# EAGLE board E-P-206-R2.0.0 Fuel Cell Control (Board to Board) (EAGLE 7.7.0), part 1 of 2
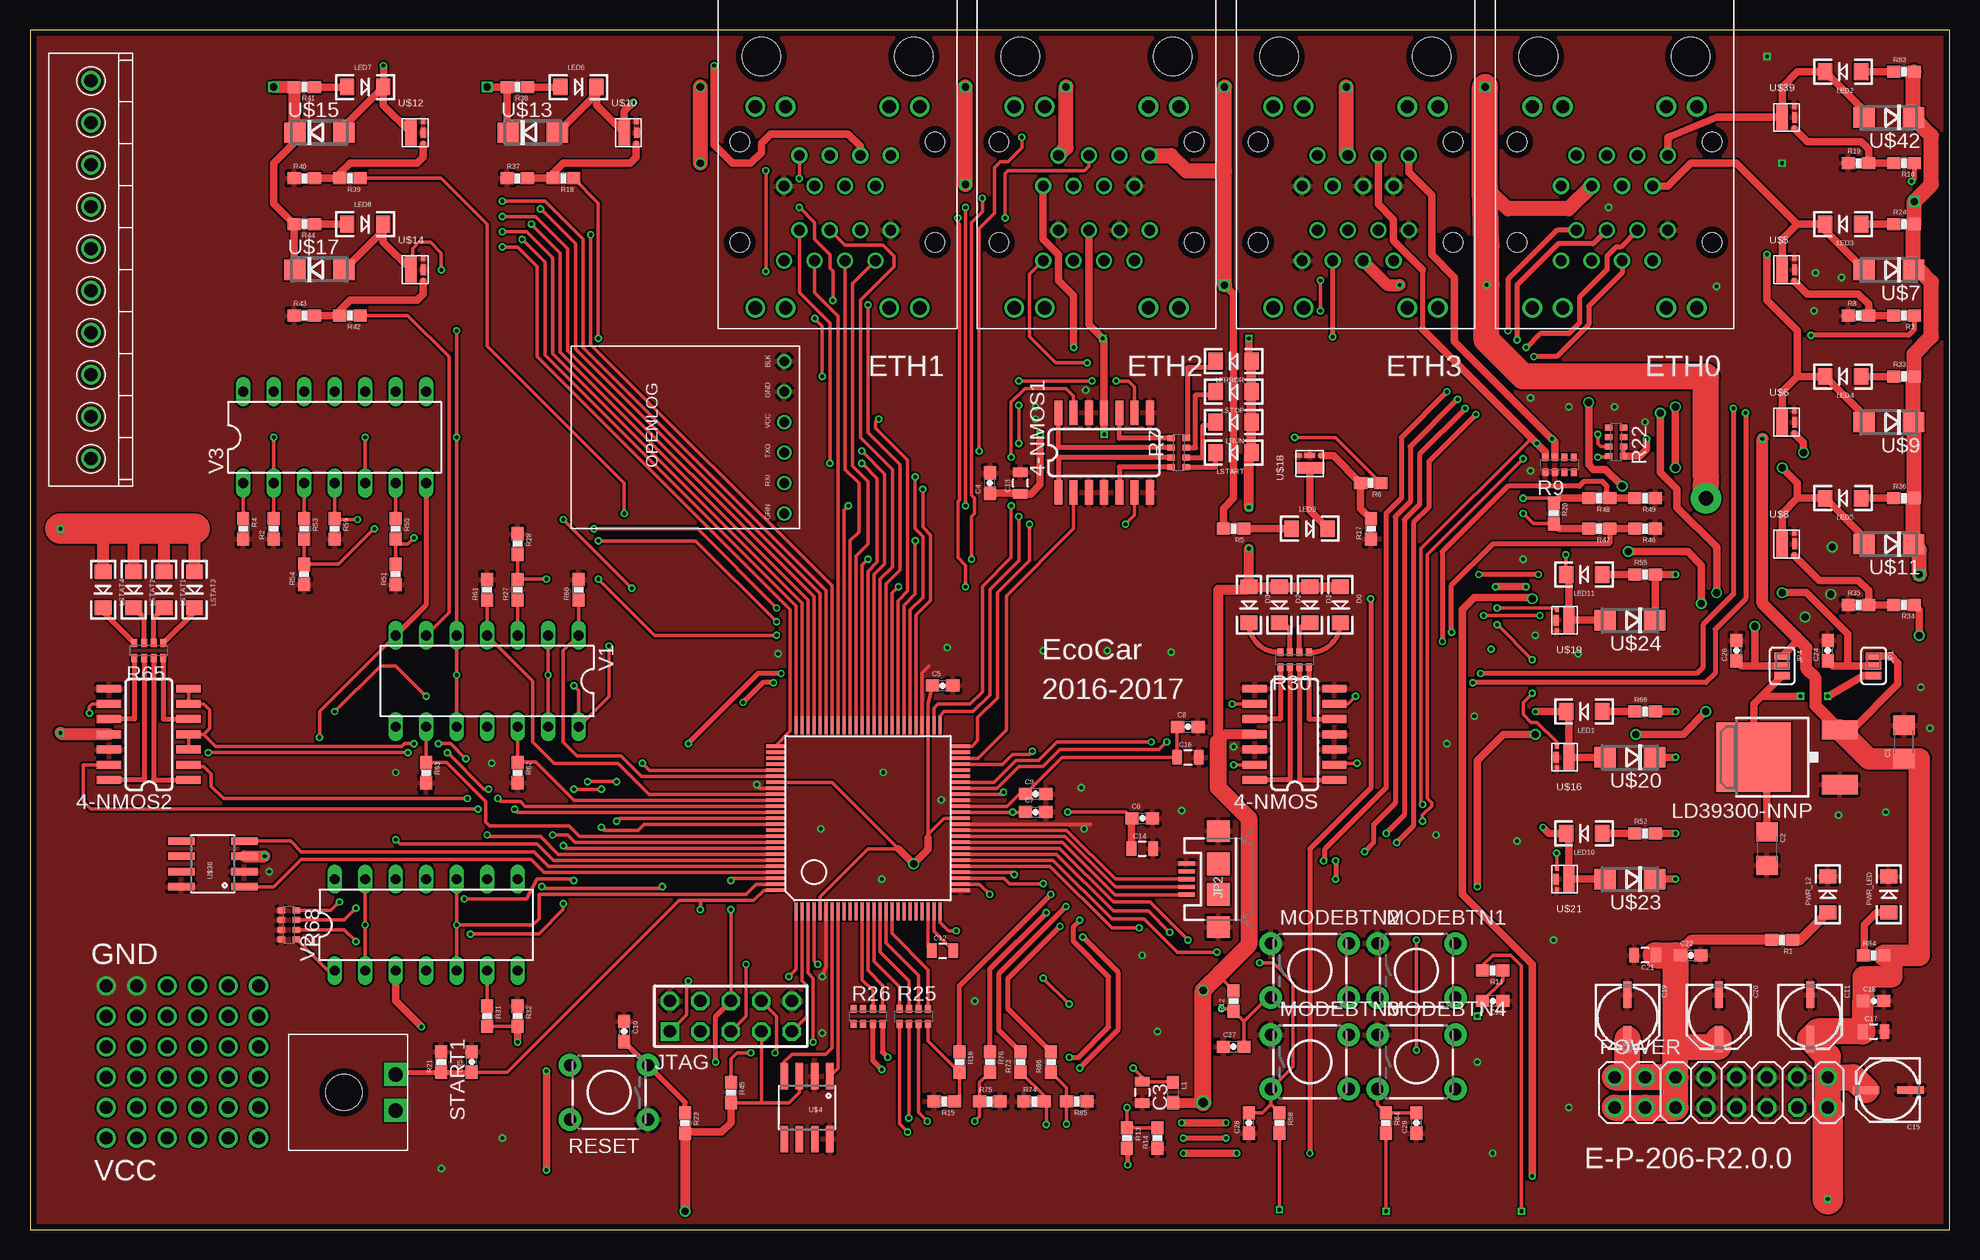
[diagram p0: board, top side]
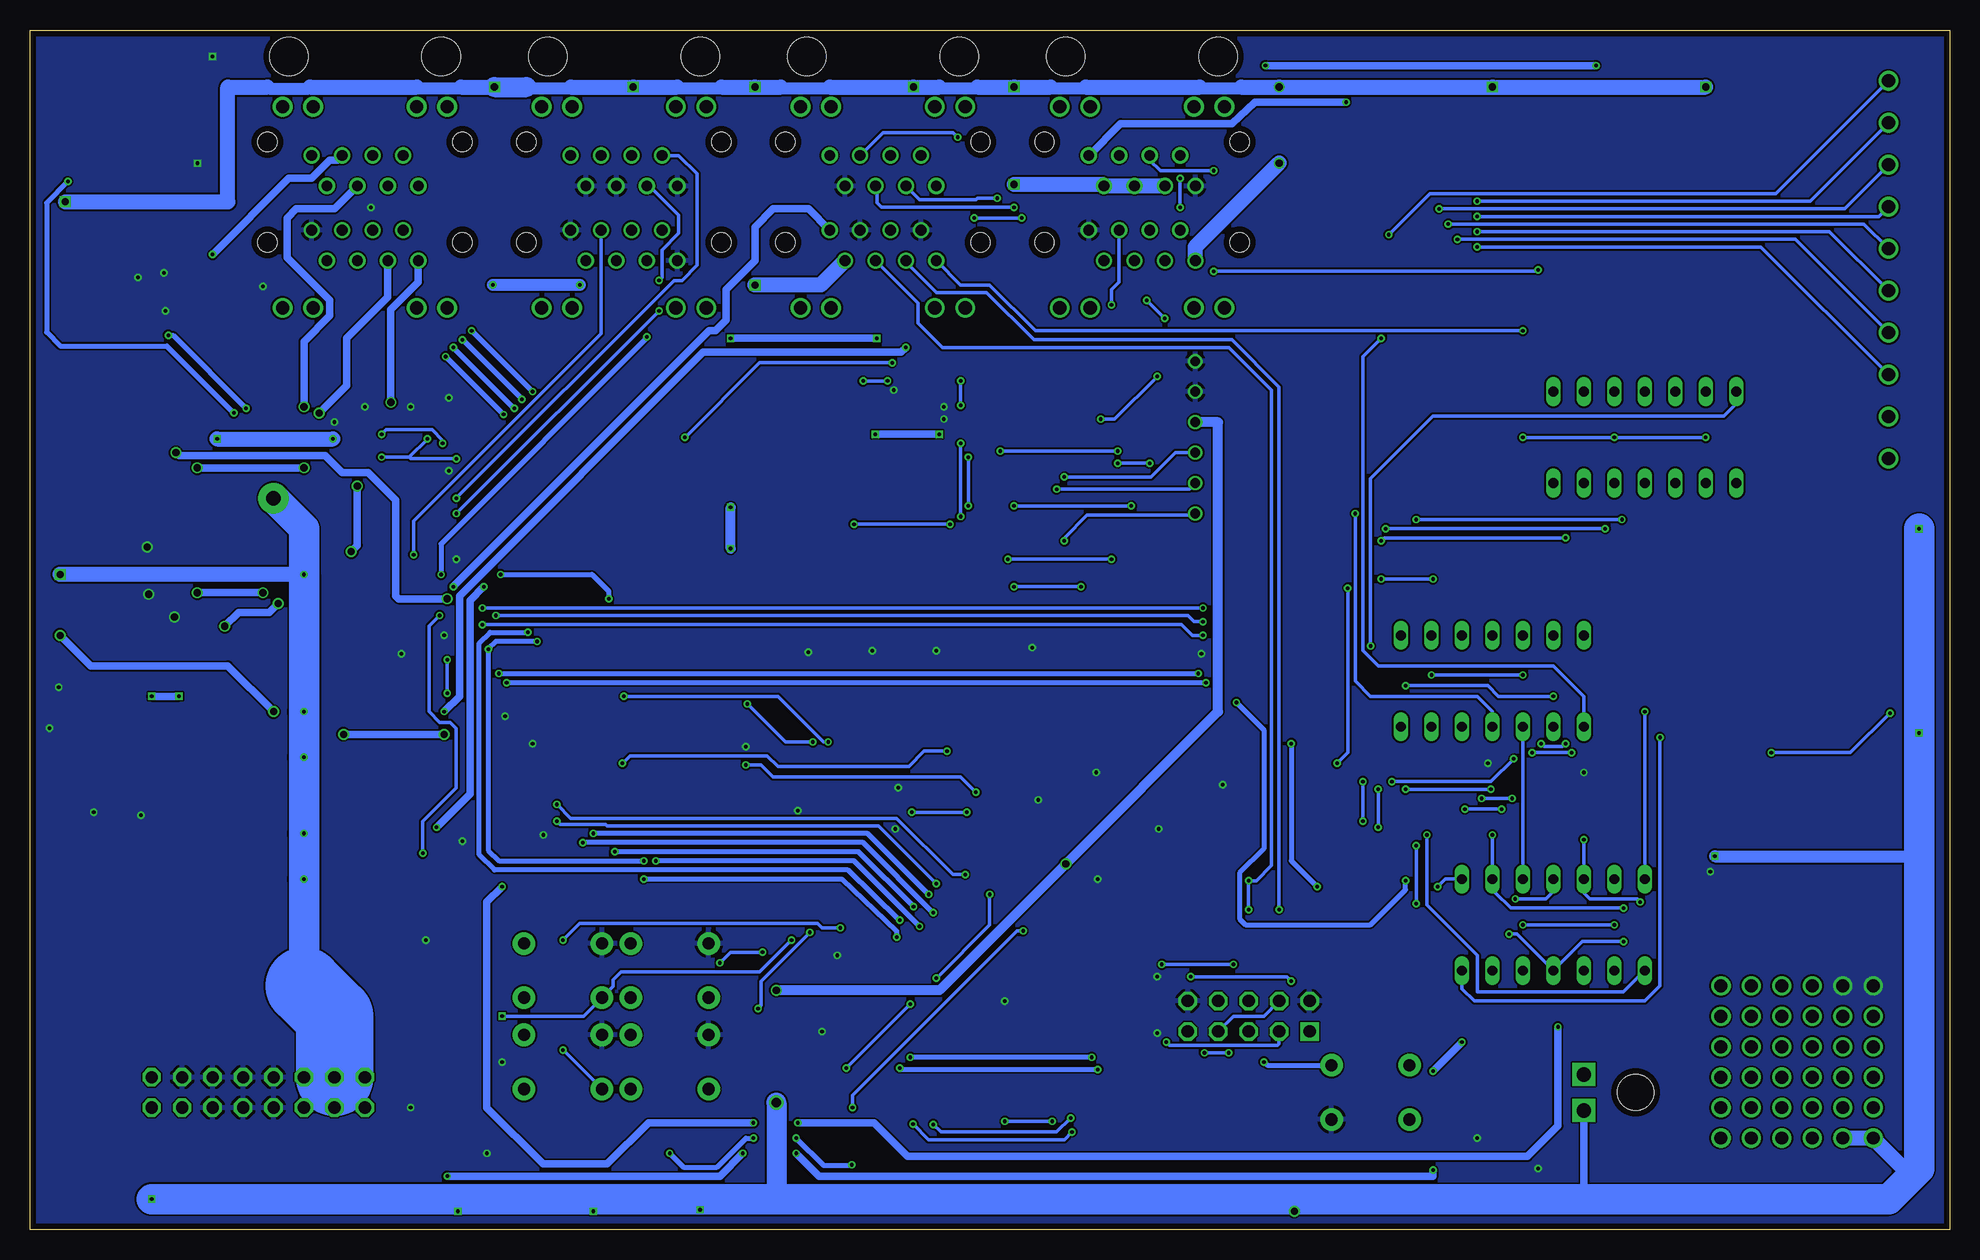
[diagram p1: board, bottom side, seen from below]

Size 160 x 100 mm. Coordinates in mm from the lower left corner, seen from the top.
Outline: 0,0 160,0 160,100 0,100 0,0
Copper layers (1*16): Top 0.035mm / dielectric 1.6mm / Bottom 0.035mm
Design rules "Elecrow_2-layer_PCB_eagle_rule": minimum track width 6mil, minimum drill 12mil, track to track 6mil, track to pad 6mil, pad to pad 6mil, via to via 8mil, smd to smd 0mil, copper to edge 20mil, drill to drill 10mil, minimum pad ring 6mil, minimum via ring 6mil, stop-mask expansion 0mil, vias tented up to drill 100mil, thermal gap 10mil

## Footprints (pad centres in the part's own frame; a part is rotated, then mirrored left to right if it is on the bottom)
SOIC-14 = smd 0.66 x 2.032: 1 -4.445,-3.315; 2 -3.175,-3.315; 3 -1.905,-3.315; 4 -0.635,-3.315; 5 0.635,-3.315; 6 1.905,-3.315; 7 3.175,-3.315; 8 3.175,3.315; 9 1.905,3.315; 10 0.635,3.315; 11 -0.635,3.315; 12 -1.905,3.315; 13 -3.175,3.315; 14 -4.445,3.315
1206 = smd 1.6 x 1.8: 1 -1.4,0; 2 1.4,0
0805 = smd 0.8 x 1.2: 1 -0.9,0; 2 0.9,0
0603-CAP = smd 1.1 x 1: 1 -0.85,0; 2 0.85,0
PANASONIC_C = smd 2.2 x 0.65: + 1.9,-0.2; - -1.8,-0.2
LED-1206 = smd 1.2 x 1.4: A -1.5,0; C 1.5,0
SJ_3_PASTE1&2 = smd 0.635 x 1.27: 1 -0.813,0; 2 0,0; 3 0.813,0
USB-MICROB = smd 0.35 x 1.4: D+ 0,2.65; D- -0.65,2.65; GND 1.3,2.65; ID 0.65,2.65; VBUS -1.3,2.65 | smd 1.8 x 1.9: MT1 -4,0; MT2 4,0 | smd 1.9 x 1.9: P$1 -1.27,0; P$2 1.27,0
AVR-JTAG-10 = drill 1.016 square: 1 -5.08,-1.27 | drill 1.016 octagon: 2 -5.08,1.27; 3 -2.54,-1.27; 4 -2.54,1.27; 5 0,-1.27; 6 0,1.27; 7 2.54,-1.27; 8 2.54,1.27; 9 5.08,-1.27; 10 5.08,1.27
0603 = smd 1.1 x 1: 1 -0.85,0; 2 0.85,0
DPACK = smd 1.6 x 3: 1 -2.28,-4.8; 3 2.28,-4.8 | smd 5.8 x 6.2: 4 0,2.38
TQFP100 = smd 0.27 x 1.5: 1 -6,-7.75; 2 -5.5,-7.75; 3 -5,-7.75; 4 -4.5,-7.75; 5 -4,-7.75; 6 -3.5,-7.75; 7 -3,-7.75; 8 -2.5,-7.75; 9 -2,-7.75; 10 -1.5,-7.75; 11 -1,-7.75; 12 -0.5,-7.75; 13 0,-7.75; 14 0.5,-7.75; 15 1,-7.75; 16 1.5,-7.75; 17 2,-7.75; 18 2.5,-7.75; 19 3,-7.75; 20 3.5,-7.75; 21 4,-7.75; 22 4.5,-7.75; 23 5,-7.75; 24 5.5,-7.75; 25 6,-7.75; 51 6,7.75; 52 5.5,7.75; 53 5,7.75; 54 4.5,7.75; 55 4,7.75; 56 3.5,7.75; 57 3,7.75; 58 2.5,7.75; 59 2,7.75; 60 1.5,7.75; 61 1,7.75; 62 0.5,7.75; 63 0,7.75; 64 -0.5,7.75; 65 -1,7.75; 66 -1.5,7.75; 67 -2,7.75; 68 -2.5,7.75; 69 -3,7.75; 70 -3.5,7.75; 71 -4,7.75; 72 -4.5,7.75; 73 -5,7.75; 74 -5.5,7.75; 75 -6,7.75 | smd 1.5 x 0.27: 26 7.75,-6; 27 7.75,-5.5; 28 7.75,-5; 29 7.75,-4.5; 30 7.75,-4; 31 7.75,-3.5; 32 7.75,-3; 33 7.75,-2.5; 34 7.75,-2; 35 7.75,-1.5; 36 7.75,-1; 37 7.75,-0.5; 38 7.75,0; 39 7.75,0.5; 40 7.75,1; 41 7.75,1.5; 42 7.75,2; 43 7.75,2.5; 44 7.75,3; 45 7.75,3.5; 46 7.75,4; 47 7.75,4.5; 48 7.75,5; 49 7.75,5.5; 50 7.75,6; 76 -7.75,6; 77 -7.75,5.5; 78 -7.75,5; 79 -7.75,4.5; 80 -7.75,4; 81 -7.75,3.5; 82 -7.75,3; 83 -7.75,2.5; 84 -7.75,2; 85 -7.75,1.5; 86 -7.75,1; 87 -7.75,0.5; 88 -7.75,0; 89 -7.75,-0.5; 90 -7.75,-1; 91 -7.75,-1.5; 92 -7.75,-2; 93 -7.75,-2.5; 94 -7.75,-3; 95 -7.75,-3.5; 96 -7.75,-4; 97 -7.75,-4.5; 98 -7.75,-5; 99 -7.75,-5.5; 100 -7.75,-6
TACTILE-PTH = drill 1.016 pad 1.88: 1 -3.251,2.261; 2 3.251,2.261; 3 -3.251,-2.261; 4 3.251,-2.261
2X08 = drill 1.016 octagon: 1 -8.89,-1.27; 2 -8.89,1.27; 3 -6.35,-1.27; 4 -6.35,1.27; 5 -3.81,-1.27; 6 -3.81,1.27; 7 -1.27,-1.27; 8 -1.27,1.27; 9 1.27,-1.27; 10 1.27,1.27; 11 3.81,-1.27; 12 3.81,1.27; 13 6.35,-1.27; 14 6.35,1.27; 15 8.89,-1.27; 16 8.89,1.27
0603-RES = smd 1.1 x 1: 1 -0.85,0; 2 0.85,0
0603-ARV = smd 0.5 x 0.65: 1 -1.2,-0.625; 2 -0.4,-0.625; 3 0.4,-0.625; 4 1.2,-0.625; 5 1.2,0.625; 6 0.4,0.625; 7 -0.4,0.625; 8 -1.2,0.625
2XETHERNET = drill 0.9: B_1 -4.44,8.25; B_2 -3.17,10.79; B_3 -1.9,8.25; B_4 -0.63,10.79; B_5 0.64,8.25; B_6 1.91,10.79; B_7 3.18,8.25; B_8 4.45,10.79; T_1 4.45,17.02; T_2 3.18,14.48; T_3 1.91,17.02; T_4 0.64,14.48; T_5 -0.63,17.02; T_6 -1.9,14.48; T_7 -3.17,17.02; T_8 -4.44,14.48 | drill 1.1: B_9 -6.86,4.19; B_10 -4.32,4.19; B_11 4.32,4.19; B_12 6.86,4.19; T_9 -6.86,20.95; T_10 -4.32,20.95; T_11 4.32,20.95; T_12 6.86,20.95 | hole 3.2: -6.35,0; 6.35,0 | hole 1.6: -8.13,15.49; 8.13,15.49; -8.13,7.11; 8.13,7.11
43650-0200 = drill 1.2 pad 1.93 square: P$1 -1.5,0; P$2 1.5,0 | hole 3: 0,-4.32
OPENLOG = drill 0.8: P$1 -6.35,-8.255; P$2 -3.81,-8.255; P$3 -1.27,-8.255; P$4 1.27,-8.255; P$5 3.81,-8.255; P$6 6.35,-8.255
10X1PCBBLOCK = drill 1.1: 1 -15.75,0; 2 -12.25,0; 3 -8.75,0; 4 -5.25,0; 5 -1.75,0; 6 1.75,0; 7 5.25,0; 8 8.75,0; 9 12.25,0; 10 15.75,0
8-SOIC = smd 0.61 x 2.21: 1 0.635,-0.076; 2 1.905,-0.076; 3 3.175,-0.076; 4 4.445,-0.076; 5 4.445,5.156; 6 3.175,5.156; 7 1.905,5.156; 8 0.635,5.156
SC70-6L = smd 0.95 x 2.4: D 0,0 | smd 0.35 x 0.5: G 1.01,-0.95; S@0 1.01,0.95 | smd 0.45 x 0.87: S@1 1.05,0
DO214AC = smd 1.8 x 1.7: A 2.05,0; C -2.05,0
DIL14 = drill 0.813 long: 1 -7.62,-3.81; 2 -5.08,-3.81; 3 -2.54,-3.81; 4 0,-3.81; 5 2.54,-3.81; 6 5.08,-3.81; 7 7.62,-3.81; 8 7.62,3.81; 9 5.08,3.81; 10 2.54,3.81; 11 0,3.81; 12 -2.54,3.81; 13 -5.08,3.81; 14 -7.62,3.81

## Placement (x,y rotation side)
4-NMOS  ALD1106PBL  [SOIC-14]  105.41,41.91 90 top
4-NMOS1  ALD1106PBL  [SOIC-14]  90.17,64.77 0 top
4-NMOS2  ALD1106PBL  [SOIC-14]  9.91,41.91 90 top
C1  NNP  [1206]  156.21,40.64 90 top
C2  NNP  [1206]  144.78,31.75 270 top
C3  100uF  [0805]  92.71,11.43 270 top
C4  100nF  [0603-CAP]  80.01,62.23 90 top
C5  1nF  [0603-CAP]  76.07,45.34 0 top
C6  100nF  [0603-CAP]  92.71,34.29 0 top
C7  470pF  [0603-CAP]  83.82,34.8 0 top
C8  100nF  [0603-CAP]  96.52,41.91 0 top
C9  470pF  [0603-CAP]  83.82,36.32 0 top
C10  22nF  [0603-CAP]  49.53,16.51 270 top
C11  100uF  [PANASONIC_C]  148.59,17.78 270 top
C12  100nF  [0805]  76.07,23.24 0 top
C13  4.7uF  [0805]  82.55,62.23 90 top
C14  4.7uF  [0805]  92.71,31.75 0 top
C15  100uF  [PANASONIC_C]  154.94,11.43 180 top
C16  2.2uF  [0805]  96.52,39.37 0 top
C17  1uF  [0805]  153.67,16.51 0 top
C18  10nF  [0603-CAP]  153.67,19.05 0 top
C19  100uF  [PANASONIC_C]  133.35,17.78 270 top
C20  100uF  [PANASONIC_C]  140.97,17.78 270 top
C21  1uF  [0805]  134.62,22.86 180 top
C22  10nF  [0603-CAP]  138.43,22.86 0 top
C23  22nF  [0603-CAP]  121.92,19.05 180 top
C24  100nF  [0603-CAP]  149.86,48.26 90 top
C25  100nF  [0603-CAP]  36.83,13.97 90 top
C26  100nF  [0603-CAP]  142.24,48.26 90 top
C27  22nF  [0603-CAP]  100.33,15.24 0 top
C28  22nF  [0603-CAP]  101.6,8.89 90 top
C29  22nF  [0603-CAP]  115.57,8.89 90 top
D0  [LED-1206]  109.22,52.07 270 top
D1  [LED-1206]  106.68,52.07 270 top
D2  [LED-1206]  104.14,52.07 270 top
D3  [LED-1206]  101.6,52.07 270 top
JP1  JUMPER-31-2  [SJ_3_PASTE1&2]  153.67,46.99 270 top
JP2  USB  [USB-MICROB]  99.06,29.21 90 top
JP4  JUMPER-31-2  [SJ_3_PASTE1&2]  146.05,46.99 270 top
JTAG  2x5  [AVR-JTAG-10]  58.42,17.78 0 top
L1  BLM18KG221SN1D  [0603]  95.25,11.43 270 top
LD39300-NNP  LD117ADT50TR  [DPACK]  146.05,39.37 90 top
LED1  [LED-1206]  129.54,43.18 180 top
LED2  [LED-1206]  151.13,96.52 180 top
LED3  [LED-1206]  151.13,83.82 180 top
LED4  [LED-1206]  151.13,71.12 180 top
LED5  [LED-1206]  151.13,60.96 180 top
LED6  [LED-1206]  45.72,95.25 0 top
LED7  [LED-1206]  27.94,95.25 0 top
LED8  [LED-1206]  27.94,83.82 0 top
LED9  [LED-1206]  106.68,58.42 0 top
LED10  [LED-1206]  129.54,33.02 180 top
LED11  [LED-1206]  129.54,54.61 180 top
LERROR  RED  [LED-1206]  100.33,72.39 180 top
LRUN  GREEN  [LED-1206]  100.33,67.31 180 top
LSTART  BLUE  [LED-1206]  100.33,64.77 180 top
LSTAT1  GREEN  [LED-1206]  11.18,53.34 270 top
LSTAT2  YELLOW  [LED-1206]  8.64,53.34 270 top
LSTAT3  BLUE  [LED-1206]  13.72,53.34 270 top
LSTAT4  RED  [LED-1206]  6.1,53.34 270 top
LSTOP  YELLOW  [LED-1206]  100.33,69.85 180 top
MCU  AT32UC3C1512  [TQFP100]  69.85,34.29 0 top
MODEBTN1  SWITCH-MOMENTARY-2PTH  [TACTILE-PTH]  115.57,21.59 0 top
MODEBTN2  SWITCH-MOMENTARY-2PTH  [TACTILE-PTH]  106.68,21.59 0 top
MODEBTN3  SWITCH-MOMENTARY-2PTH  [TACTILE-PTH]  106.68,13.97 0 top
MODEBTN4  SWITCH-MOMENTARY-2PTH  [TACTILE-PTH]  115.57,13.97 0 top
POWER  [2X08]  140.97,11.43 0 top
PWR_12  GREEN  [LED-1206]  149.86,27.94 90 top
PWR_LED  [LED-1206]  154.94,27.94 90 top
R1  1k  [0603-RES]  146.05,24.13 180 top
R2  10k\  [0603-RES]  20.32,58.42 90 top
R3  1k  [0603-RES]  156.21,76.2 180 top
R4  10k  [0603-RES]  17.78,58.42 270 top
R5  1k  [0603-RES]  100.33,58.42 180 top
R6  1k  [0603-RES]  111.76,62.23 180 top
R7  470  [0603-ARV]  95.76,64.77 270 top
R8  10k  [0603-RES]  152.4,76.2 0 top
R9  100k  [0603-ARV]  127.51,63.75 0 top
R10  1k  [0603-RES]  156.21,88.9 180 top
R11  10k  [0603-RES]  121.92,21.59 180 top
R12  10k  [0603-RES]  100.33,19.05 90 top
R13  31.6k 1%  [0603-RES]  91.44,7.62 270 top
R14  47k 1%  [0603-RES]  93.98,7.62 90 top
R15  3k 1%  [0603-RES]  76.2,10.67 180 top
R16  47k 1%  [0603-RES]  77.47,13.97 270 top
R17  10k  [0603-RES]  111.76,58.42 90 top
R18  1k  [0603-RES]  44.45,87.63 180 top
R19  10k  [0603-RES]  152.4,88.9 0 top
R20  10k  [0603-RES]  127,59.69 270 top
R21  4.7k  [0603-RES]  34.29,13.97 90 top
R22  100k  [0603-ARV]  132.21,65.66 90 top
R23  10k  [0603-RES]  54.61,8.89 270 top
R24  1k  [0603-RES]  156.21,83.82 0 top
R25  10k  [0603-ARV]  73.66,17.78 180 top
R26  10k  [0603-ARV]  69.85,17.78 180 top
R27  1k  [0603-RES]  40.64,53.34 90 top
R28  10k  [0603-RES]  40.64,57.15 270 top
R30  470  [0603-ARV]  105.41,47.5 0 top
R31  1k  [0603-RES]  38.1,17.78 270 top
R32  10k  [0603-RES]  40.64,17.78 270 top
R33  1k  [0603-RES]  156.21,71.12 0 top
R34  1k  [0603-RES]  156.21,52.07 180 top
R35  10k  [0603-RES]  152.4,52.07 0 top
R36  1k  [0603-RES]  156.21,60.96 0 top
R37  10k  [0603-RES]  40.64,87.63 0 top
R38  1k  [0603-RES]  40.64,95.25 180 top
R39  1k  [0603-RES]  26.67,87.63 180 top
R40  10k  [0603-RES]  22.86,87.63 0 top
R41  1k  [0603-RES]  22.86,95.25 180 top
R42  1k  [0603-RES]  26.67,76.2 180 top
R43  10k  [0603-RES]  22.86,76.2 0 top
R44  1k  [0603-RES]  22.86,83.82 180 top
R45  10k  [0603-RES]  58.42,11.43 270 top
R46  47k 1%  [0603-RES]  134.62,58.42 180 top
R47  31.6k 1%  [0603-RES]  130.81,58.42 180 top
R48  31.6k 1%  [0603-RES]  130.81,60.96 180 top
R49  47k 1%  [0603-RES]  134.62,60.96 180 top
R50  1k  [0603-RES]  30.48,58.42 270 top
R51  10k  [0603-RES]  30.48,54.61 90 top
R52  1k  [0603-RES]  134.62,33.02 0 top
R53  1k  [0603-RES]  22.86,58.42 270 top
R54  10k  [0603-RES]  22.86,54.61 90 top
R55  1k  [0603-RES]  134.62,54.61 0 top
R58  10k  [0603-RES]  104.14,8.89 270 top
R59  10k  [0603-RES]  25.4,58.42 270 top
R60  10k  [0603-RES]  45.72,53.34 90 top
R61  10k  [0603-RES]  38.1,53.34 90 top
R62  10k  [0603-RES]  40.64,38.1 270 top
R63  10k  [0603-RES]  33.02,38.1 270 top
R64  10k  [0603-RES]  113.03,8.89 270 top
R65  470  [0603-ARV]  9.91,48.26 0 top
R66  1k  [0603-RES]  134.62,43.18 0 top
R68  10k  [0603-ARV]  21.59,25.4 90 top
R73  31.6k 1%  [0603-RES]  82.55,13.97 90 top
R74  47k 1%  [0603-RES]  83.69,10.67 0 top
R75  3k 1%  [0603-RES]  80.01,10.67 0 top
R76  47k 1%  [0603-RES]  80.01,13.97 270 top
R83  1k  [0603-RES]  156.21,96.52 0 top
R84  100  [0603-RES]  153.67,22.86 0 top
R85  47k 1%  [0603-RES]  87.25,10.67 180 top
R86  31.6k 1%  [0603-RES]  85.09,13.97 90 top
RESET  SWITCH-MOMENTARY-2PTH  [TACTILE-PTH]  48.26,11.43 180 top
RJ45_0_  2XETHERNET  [2XETHERNET]  132.08,97.79 180 top
RJ45_1_  2XETHERNET  [2XETHERNET]  67.31,97.79 180 top
RJ45_2_  2XETHERNET  [2XETHERNET]  88.9,97.79 180 top
RJ45_3_  2XETHERNET  [2XETHERNET]  110.49,97.79 180 top
START1  43650-0200  [43650-0200]  30.48,11.43 270 top
U$1  OPENLOG  [OPENLOG]  54.61,66.04 90 top
U$2  10X1PCBBLOCK  [10X1PCBBLOCK]  5.08,80.01 270 top
U$4  MCP2551  [8-SOIC]  67.31,12.7 180 top
U$5  SIA448DJ-T1  [SC70-6L]  146.05,80.01 0 top
U$6  SIA448DJ-T1  [SC70-6L]  146.05,67.31 0 top
U$7  [DO214AC]  154.94,80.01 180 top
U$8  SIA448DJ-T1  [SC70-6L]  146.05,57.15 0 top
U$9  [DO214AC]  154.94,67.31 180 top
U$10  SIA448DJ-T1  [SC70-6L]  49.53,91.44 0 top
U$11  [DO214AC]  154.94,57.15 180 top
U$12  SIA448DJ-T1  [SC70-6L]  31.75,91.44 0 top
U$13  [DO214AC]  41.91,91.44 0 top
U$14  SIA448DJ-T1  [SC70-6L]  31.75,80.01 0 top
U$15  [DO214AC]  24.13,91.44 0 top
U$16  SIA448DJ-T1  [SC70-6L]  128.27,39.37 180 top
U$17  [DO214AC]  24.13,80.01 0 top
U$18  SIA448DJ-T1  [SC70-6L]  106.68,63.5 90 top
U$19  SIA448DJ-T1  [SC70-6L]  128.27,50.8 180 top
U$20  [DO214AC]  133.35,39.37 180 top
U$21  SIA448DJ-T1  [SC70-6L]  128.27,29.21 180 top
U$23  [DO214AC]  133.35,29.21 180 top
U$24  [DO214AC]  133.35,50.8 180 top
U$36  MCP2551  [8-SOIC]  17.78,27.94 90 top
U$39  SIA448DJ-T1  [SC70-6L]  146.05,92.71 0 top
U$42  [DO214AC]  154.94,92.71 180 top
V1  SN74HC08N  [DIL14]  38.1,45.72 180 top
V2  SN74HC08N  [DIL14]  33.02,25.4 0 top
V3  SN74HC08N  [DIL14]  25.4,66.04 0 top

## Library data of the parts
4-NMOS 4-NMOS1 4-NMOS2 RJ45_0_ RJ45_1_ RJ45_2_ RJ45_3_ START1 U$2 U$4-U$6 U$8 U$10 U$12 U$14 U$16 U$18 U$19 U$21 U$36 U$39 = Shell2013
C1-C10 C18 C22-C29 D0 D1-D3 JP1 JP4 L1 LED1-LED11 LERROR LRUN LSTART LSTAT1-LSTAT4 LSTOP PWR_LED R1-R6 R8-R24 R27 R28 R31-R55 R58-R64 R66 R68 R73-R76 R83 R85 R86 = SparkFun
C11-C17 C19-C21 = SparkFun-Capacitors
JP2 = SparkFun-Connectors; PROD_ID: CONN-09505
JTAG = avr-7
LD39300-NNP = v-reg
MCU = uniq-at32uc3c; FLASH: 512KB
MODEBTN1-MODEBTN4 RESET = SparkFun-Electromechanical; PROD_ID: SWCH-08441
POWER = pinhead
PWR_12 = SparkFun-LED
R7 R25 R26 R30 R65 = SparkFun-Resistors
R84 = SparkFun-Passives
U$1 = openlog
U$7 U$9 U$11 U$13 U$15 U$17 U$20 U$23 U$24 U$42 = diode
V1-V3 = 74ttl-din

## Nets
3V: C2.1 JP1.3 JP4.3 LD39300-NNP.4
+12V: C19.+ C20.+ C21.1 C22.1 POWER.1 POWER.2 POWER.3 POWER.4 POWER.5 POWER.6 R1.2 R5.2 R24.2 R33.2 R36.2 R38.2 R41.2 R44.2 R52.2 R55.2 R66.2 R83.2 RJ45_0_.B_6 RJ45_1_.B_2 RJ45_1_.B_4 RJ45_1_.B_6 RJ45_1_.T_1 RJ45_2_.B_1 RJ45_2_.B_7 RJ45_2_.T_7 RJ45_3_.B_5 RJ45_3_.T_5 U$7.C U$9.C U$11.C U$13.C U$15.C U$17.C U$20.C U$23.C U$24.C U$42.C
+UB: V1.14 V2.14 V3.14
-UB: V1.7 V2.7 V3.7
ANA_DECOUP: C3.1 L1.1 MCU.27
CAN-EXP_RX: MCU.96 U$36.4
CAN-EXP_TX: MCU.97 U$36.1
CAN_N: U$4.6
CAN_P: U$4.7
CAN_RX: MCU.7 U$4.4
CAN_TX: MCU.8 U$4.1
CANEXP_N: U$36.6
CANEXP_P: U$36.7
CAPCURR: R86.2 RJ45_0_.T_2
CAPCURR(S): R25.5 R85.2 R86.1
CAPCURR_V_R: C26.1 JP4.2 RJ45_0_.T_1
CAPREL_R: LED4.C RJ45_0_.B_3 U$6.D U$9.A
CAPVOLT: R25.7 R75.1 R76.2
CAPVOLT_R: R76.1 RJ45_0_.T_5
CVMPURGE_V_R: MCU.58 RJ45_1_.B_7
FAN1_PWM_R: MCU.63 RJ45_1_.T_2
FAN1_TACH_R: MCU.68 RJ45_1_.T_3
FAN2_PWM_R: MCU.62 RJ45_2_.B_3
FAN2_TACH_R: MCU.67 RJ45_2_.B_4
FAN3_PWM_R: MCU.61 RJ45_1_.T_4
FAN3_TACH_R: MCU.66 RJ45_1_.T_5
FAN4_PWM_R: MCU.60 RJ45_1_.T_6
FAN4_TACH_R: MCU.65 RJ45_1_.T_7
FAN5_PWM_R: MCU.59 RJ45_2_.B_5
FAN5_TACH_R: MCU.64 RJ45_2_.B_6
FC_PWR_GOOD: POWER.13
FCCURR: R73.2 RJ45_0_.T_4
FCCURR(S): R25.6 R73.1 R74.2
FCCURR_V_R: C24.1 JP1.2 RJ45_0_.T_3
FCPRES_S0_R: R20.1 R48.2 RJ45_3_.B_7
FCPRES_S1_R: R20.2 R47.2 RJ45_3_.B_6
FCPRES_S+(S): R26.8 R46.2 R47.1
FCPRES_S-(S): R26.7 R48.1 R49.2
FCTEMP1: MCU.28 R9.7 R22.8 RJ45_3_.B_1
FCTEMP2: MCU.29 R9.8 R22.7 RJ45_3_.B_3
FCVOLT: R15.1 R16.2 R25.8
FCVOLT_R: R16.1 RJ45_0_.T_6
GND: 4-NMOS1.3 4-NMOS1.4 4-NMOS1.7 4-NMOS1.8 4-NMOS1.12 4-NMOS2.8 4-NMOS2.12 4-NMOS.3 4-NMOS.4 4-NMOS.7 4-NMOS.8 4-NMOS.12 C1.2 C2.2 C3.2 C4.2 C5.2 C6.2 C7.2 C8.2 C9.2 C10.1 C11.- C13.2 C14.2 C15.- C16.2 C17.2 C18.2 C19.- C20.- C21.2 C22.2 C23.1 C24.2 C25.2 C26.2 C27.1 C28.1 C29.1 JP2.GND JP2.MT1 JP2.MT2 JTAG.2 JTAG.10 LD39300-NNP.1 MCU.6 MCU.26 MCU.37 MCU.41 MCU.54 MCU.83 MODEBTN1.1 MODEBTN2.1 MODEBTN3.1 MODEBTN4.1 POWER.7 POWER.8 POWER.9 POWER.10 POWER.11 POWER.12 POWER.14 PWR_12.C PWR_LED.C R2.1 R4.2 R8.1 R9.1 R9.2 R14.1 R15.2 R17.1 R19.1 R21.2 R28.1 R32.1 R35.1 R37.1 R40.1 R43.1 R46.1 R49.1 R51.1 R54.1 R59.2 R60.2 R61.2 R62.2 R63.2 R68.5 R68.6 R68.7 R68.8 R74.1 R75.2 R85.1 RESET.1 RJ45_0_.T_8 RJ45_1_.B_8 RJ45_1_.T_8 RJ45_2_.B_2 RJ45_2_.T_2 RJ45_2_.T_6 RJ45_3_.B_2 RJ45_3_.B_4 RJ45_3_.B_8 RJ45_3_.T_1 RJ45_3_.T_8 U$1.P$5 U$1.P$6 U$4.2 U$4.8 U$5.S@0 U$5.S@1 U$6.S@0 U$6.S@1 U$8.S@0 U$8.S@1 U$10.S@0 U$10.S@1 U$12.S@0 U$12.S@1 U$14.S@0 U$14.S@1 U$16.S@0 U$16.S@1 U$18.S@0 U$18.S@1 U$19.S@0 U$19.S@1 U$21.S@0 U$21.S@1 U$36.2 U$36.8 U$39.S@0 U$39.S@1
LED0: 4-NMOS.6 MCU.44
LED0_O: D0.C R30.5
LED1: 4-NMOS.2 MCU.47
LED1_O: D1.C R30.6
LED2: 4-NMOS.13 MCU.42
LED2_O: D2.C R30.7
LED3: 4-NMOS.9 MCU.43
LED3_O: D3.C R30.8
LED_ERROR: 4-NMOS1.9 MCU.51
LED_RUN: 4-NMOS1.2 MCU.48
LED_START: 4-NMOS1.6 MCU.50
LED_STAT1: 4-NMOS2.2 MCU.86
LED_STAT2: 4-NMOS2.13 MCU.87
LED_STAT3: 4-NMOS2.3 4-NMOS2.4 4-NMOS2.6 4-NMOS2.7 MCU.88
LED_STAT4: 4-NMOS2.9 MCU.89
LED_STOP: 4-NMOS1.13 MCU.52
MCU_RST: C10.2 JTAG.6 MCU.98 R23.1 RESET.3 RJ45_2_.T_5
MFLOW: R13.2 RJ45_3_.T_3
MFLOW(S): MCU.25 R13.1 R14.2
MODEBTN1: C23.2 MCU.33 MODEBTN1.3 R11.1
MODEBTN2: C27.2 MCU.32 MODEBTN2.3 R12.1
MODEBTN3: C28.2 MCU.31 MODEBTN3.3 R58.1
MODEBTN4: C29.2 MCU.30 MODEBTN4.3 R64.1
MOTORREL_R: LED3.C RJ45_0_.B_2 U$5.D U$7.A
N$2: 4-NMOS.5 R30.4
N$3: MCU.12 R26.2
N$4: 4-NMOS.1 R30.3
N$5: MCU.13 R26.1
N$6: C6.1 C7.1 C14.1 MCU.39
N$7: 4-NMOS.14 R30.2
N$8: 4-NMOS.10 R30.1
N$9: C8.1 C9.1 C16.1 MCU.40
N$10: C12.1 MCU.23
N$11: C12.2 MCU.24
N$14: LED9.A R5.1
N$15: R10.2 R19.2 U$39.G
N$16: LED9.C U$18.D
N$17: PWR_LED.A R84.1
N$18: R3.2 R8.2 U$5.G
N$19: LED2.A R83.1
N$20: R31.2 R32.2 U$6.G
N$21: MCU.14 R25.4
N$22: MCU.69 U$2.1
N$23: MCU.70 U$2.2
N$24: MCU.71 U$2.3
N$25: LSTART.C R7.5
N$26: LRUN.C R7.6
N$27: MCU.15 R25.3
N$28: MCU.16 R25.2
N$29: MCU.17 R25.1
N$30: MCU.72 U$2.4
N$31: MCU.73 U$2.5
N$32: 4-NMOS1.5 R7.4
N$33: 4-NMOS1.1 R7.3
N$34: PWR_12.A R1.1
N$35: LED3.A R24.1
N$36: MCU.74 U$2.6
N$37: MCU.75 U$2.7
N$38: MCU.76 U$2.8
N$39: 4-NMOS2.5 R65.4
N$40: 4-NMOS2.1 R65.3
N$41: 4-NMOS2.14 R65.2
N$42: 4-NMOS2.10 R65.1
N$43: LSTAT3.C R65.5
N$44: 4-NMOS1.14 R7.2
N$45: 4-NMOS1.10 R7.1
N$46: LSTOP.C R7.7
N$47: LERROR.C R7.8
N$48: R34.2 R35.2 U$8.G
N$49: LED4.A R33.1
N$50: LSTAT1.C R65.6
N$51: R18.2 R37.2 U$10.G
N$52: LSTAT2.C R65.7
N$53: LED5.A R36.1
N$54: R27.2 R28.2 U$16.G
N$55: LSTAT4.C R65.8
N$56: R39.2 R40.2 U$12.G
N$57: LED6.A R38.1
N$60: R42.2 R43.2 U$14.G
N$61: LED7.A R41.1
N$62: R50.2 R51.2 U$21.G
N$65: LED8.A R44.1
N$66: MCU.9
N$68: R53.2 R54.2 U$19.G
N$69: R6.2 R17.2 U$18.G
N$70: LED1.A R66.1
N$73: LED10.A R52.1
N$76: LED11.A R55.1
N$91: JTAG.8 R45.1
OP1_R: LED8.C RJ45_1_.B_5 U$14.D U$17.A
OP-1: MCU.95 R68.4 V2.12
OP-1S: R10.1 V2.11
OP-2: MCU.94 R68.3 V2.9
OP-2S: R3.1 V2.8
OP-3: MCU.93 R68.2 V2.4
OP-3S: R31.1 V2.6
OP-4: MCU.92 R68.1 V2.1
OP-4S: R34.1 V2.3
OP-5: MCU.91 R63.1 V1.9
OP-5S: R18.1 V1.8
OP-6: MCU.85 R62.1 V1.12
OP-6S: R39.1 V1.11
OP-7: MCU.84 R61.1 V1.4
OP-7S: R42.1 V1.6
OP-8: MCU.81 R60.1 V1.1
OP-8S: R27.1 V1.3
OP-9: MCU.80 R59.1 V3.4
OP-9S: R50.1 V3.6
OP-10: R4.1 V3.1
OP-10S: R53.1 V3.3
OP_8S_R: LED1.C RJ45_2_.B_8 U$16.D U$20.A
OP_9S_R: LED10.C RJ45_2_.T_8 U$21.D U$23.A
OP_10S_R: LED11.C RJ45_3_.T_6 U$19.D U$24.A
OPENLOG_DTR: MCU.57 U$1.P$1
OPENLOG_RX: MCU.56 U$1.P$3
OPENLOG_TX: MCU.55 U$1.P$2
PURGEVLV_V_R: LED7.C RJ45_1_.B_3 U$12.D U$15.A
RESREL_R: LED5.C RJ45_0_.B_4 U$8.D U$11.A
START(S): C25.1 MCU.100 R21.1 RJ45_2_.T_3 START1.P$1
STARTUPREL_R: LED2.C RJ45_0_.B_1 U$39.D U$42.A
SUPPLYVLV_V_R: LED6.C RJ45_1_.B_1 U$10.D U$13.A
SYS_OK: MCU.99 R2.2 R6.1 RJ45_2_.T_1 V1.2 V1.5 V1.10 V1.13 V2.2 V2.5 V2.10 V2.13 V3.2 V3.5
TCK: JTAG.1 MCU.1
TDI: JTAG.9 MCU.2
TDO: JTAG.3 MCU.3
TMS: JTAG.5 MCU.4
USB_N: JP2.D- MCU.35
USB_P: JP2.D+ MCU.36
USB_VBUS: JP2.VBUS MCU.34
VCC: 4-NMOS1.11 4-NMOS2.11 4-NMOS.11 C1.1 C4.1 C5.1 C11.+ C13.1 C15.+ C17.1 C18.1 D0.A D1.A D2.A D3.A JP1.1 JP4.1 JTAG.4 JTAG.7 L1.2 LD39300-NNP.3 LERROR.A LRUN.A LSTART.A LSTAT1.A LSTAT2.A LSTAT3.A LSTAT4.A LSTOP.A MCU.5 MCU.38 MCU.53 MCU.82 POWER.15 POWER.16 R11.2 R12.2 R22.1 R22.2 R23.2 R45.2 R58.2 R64.2 R84.2 RJ45_2_.T_4 START1.P$2 U$1.P$4 U$4.3 U$36.3